# Altium PCB FPC.PcbDoc
Units mil, origin at the board's own origin, x right, y up, seen from the top; angles counter-clockwise.
Board outline 846.46 x 1196.85 mil, 4 copper layers (Top Layer, Layer 1, Layer 2, Bottom Layer), stack 23.756 mil thick; 10 components, 10 nets, 30 pads, 42 vias.
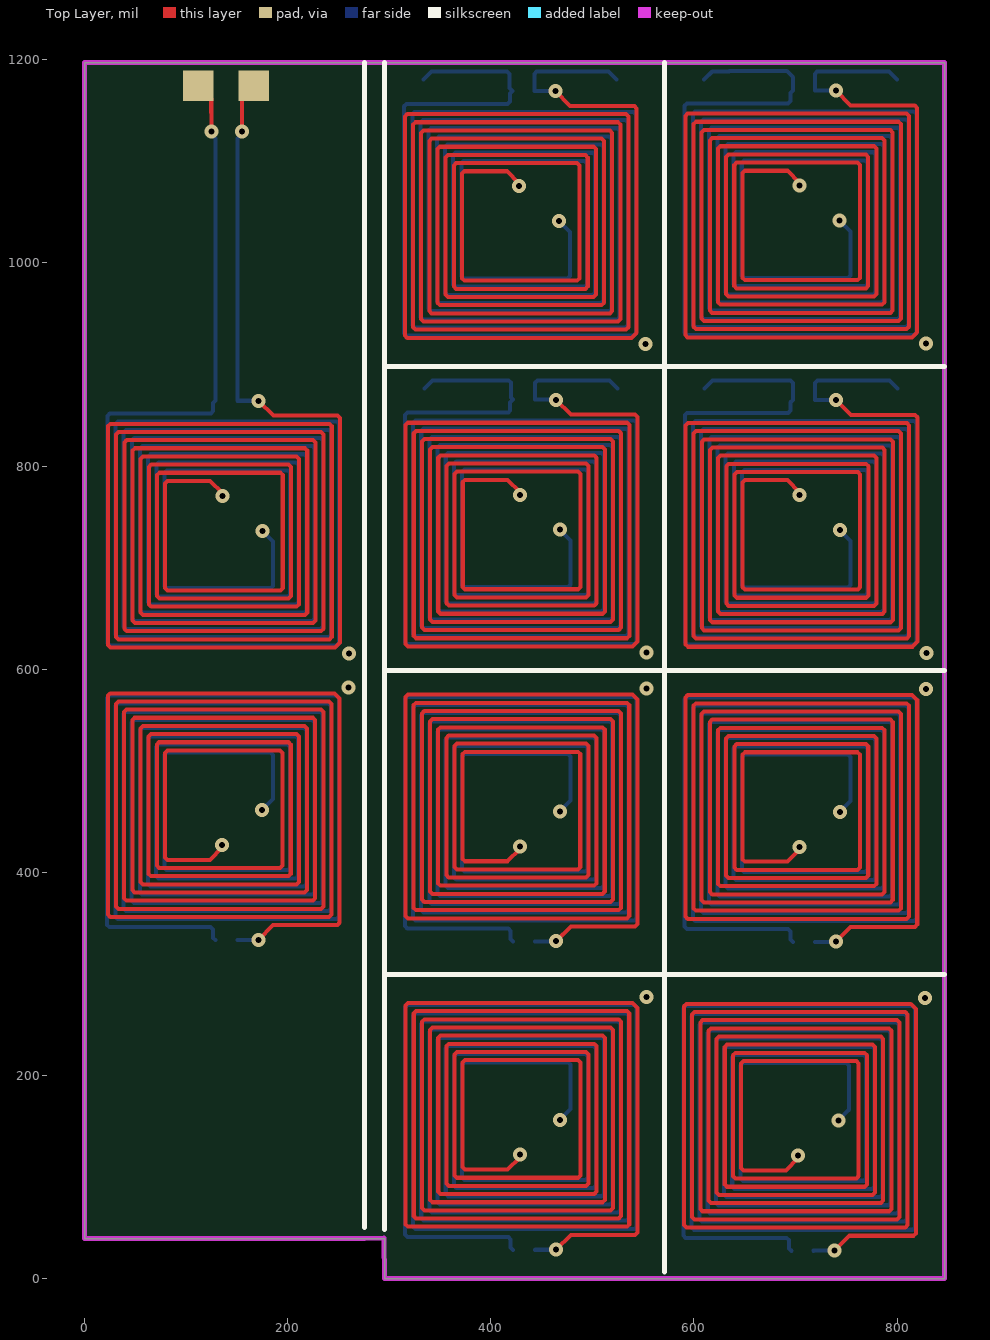
[diagram p0: Top Layer view]
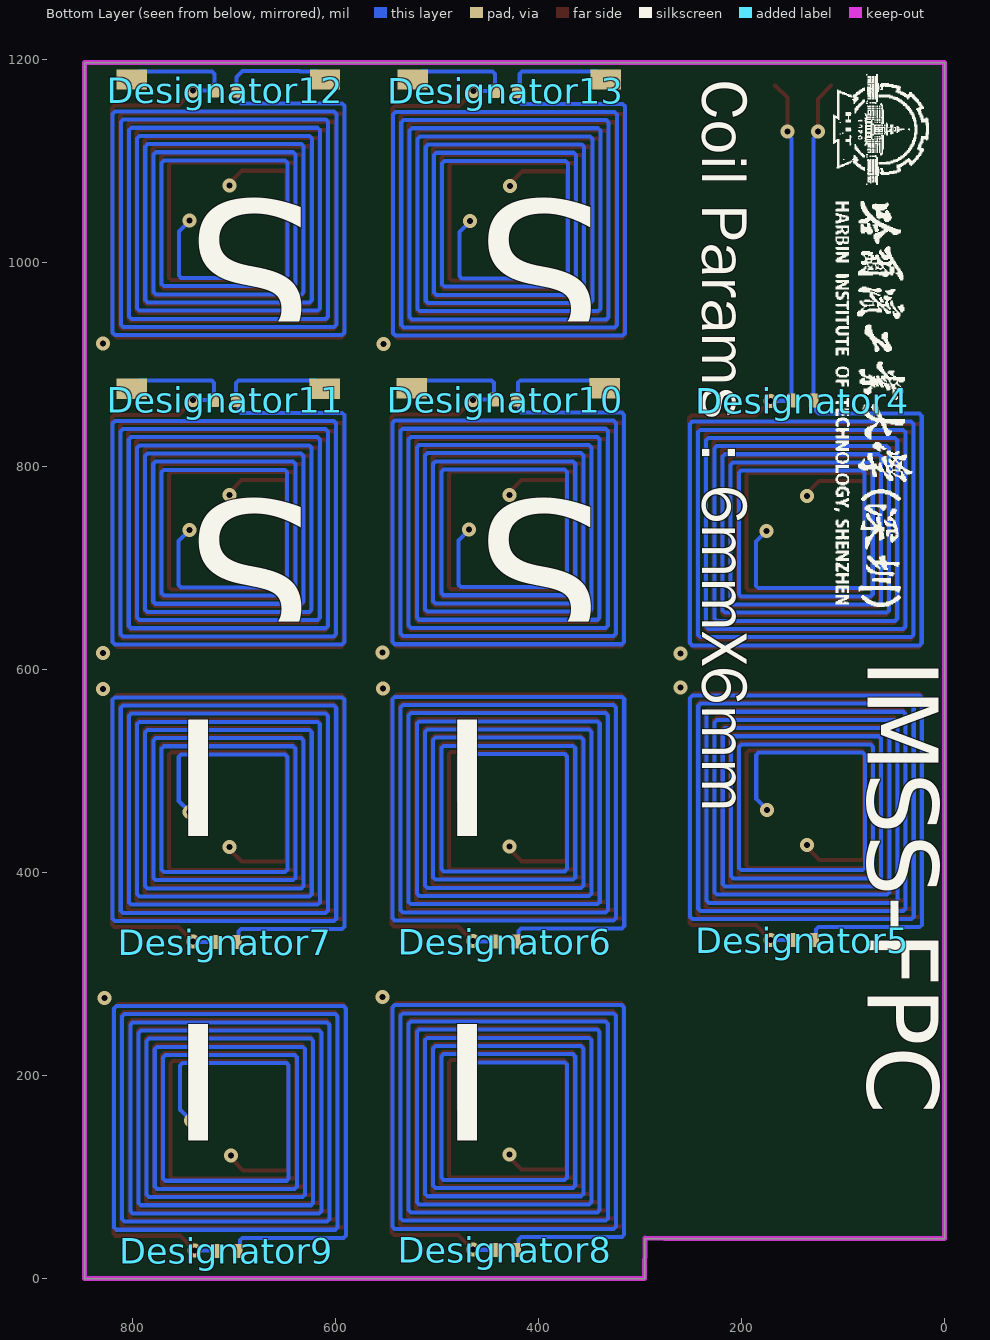
[diagram p1: Bottom Layer view, seen from below]
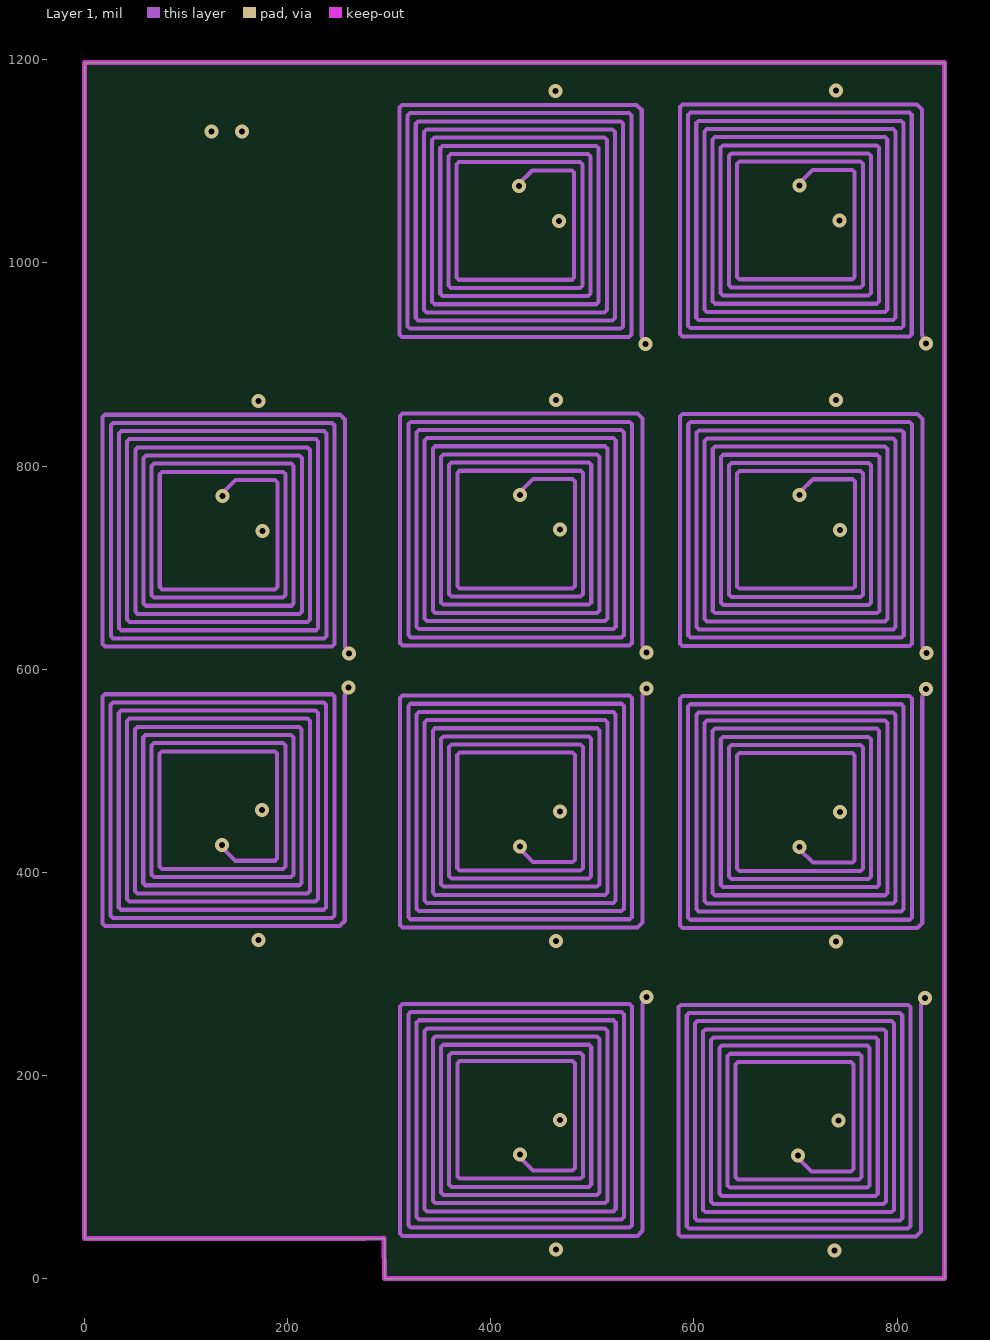
[diagram p2: Layer 1]
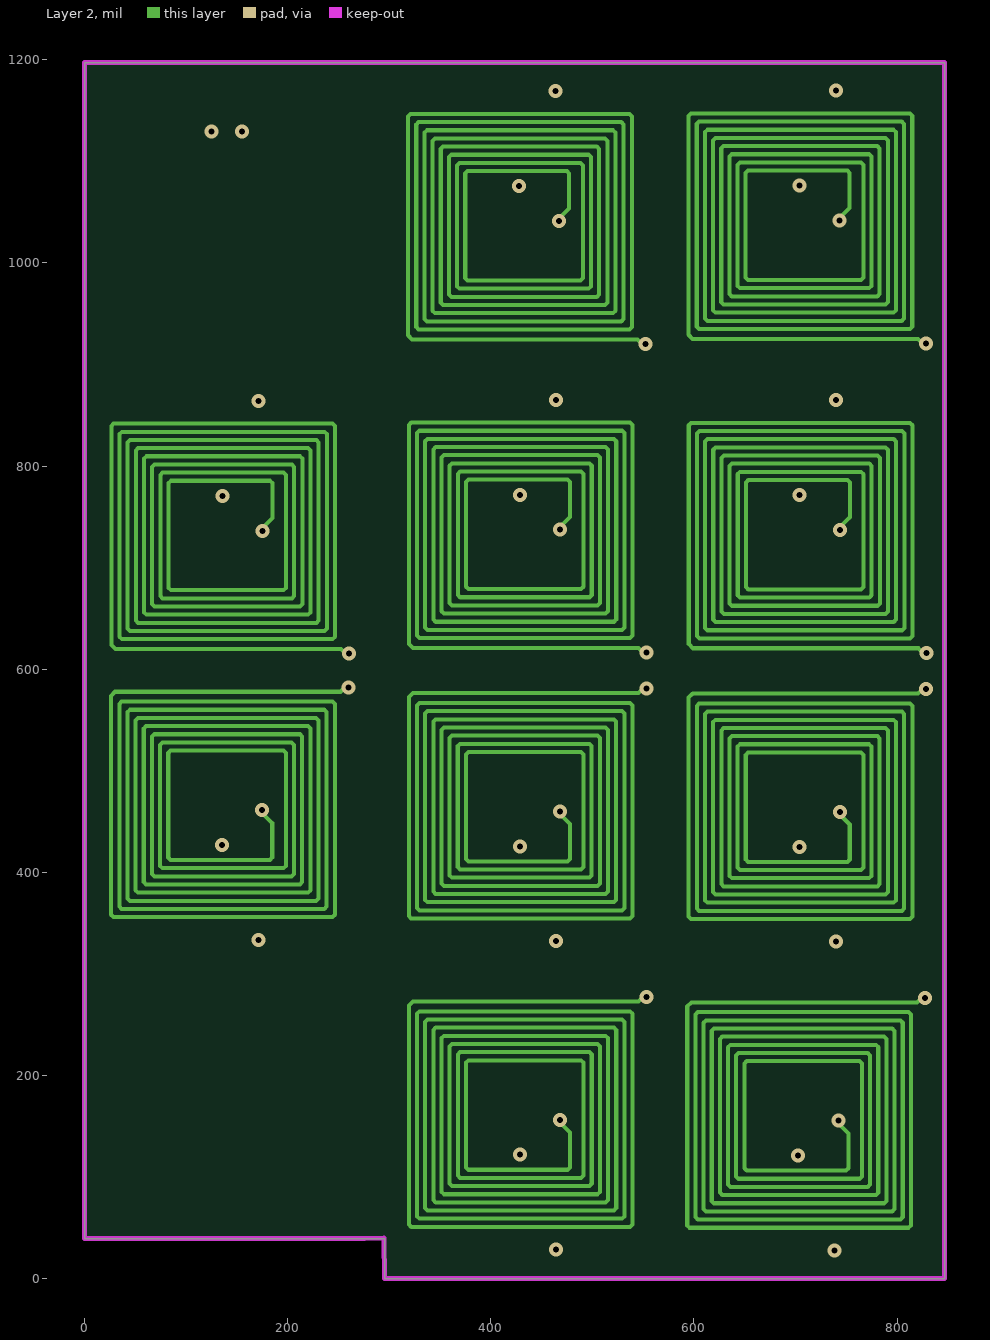
[diagram p3: Layer 2]
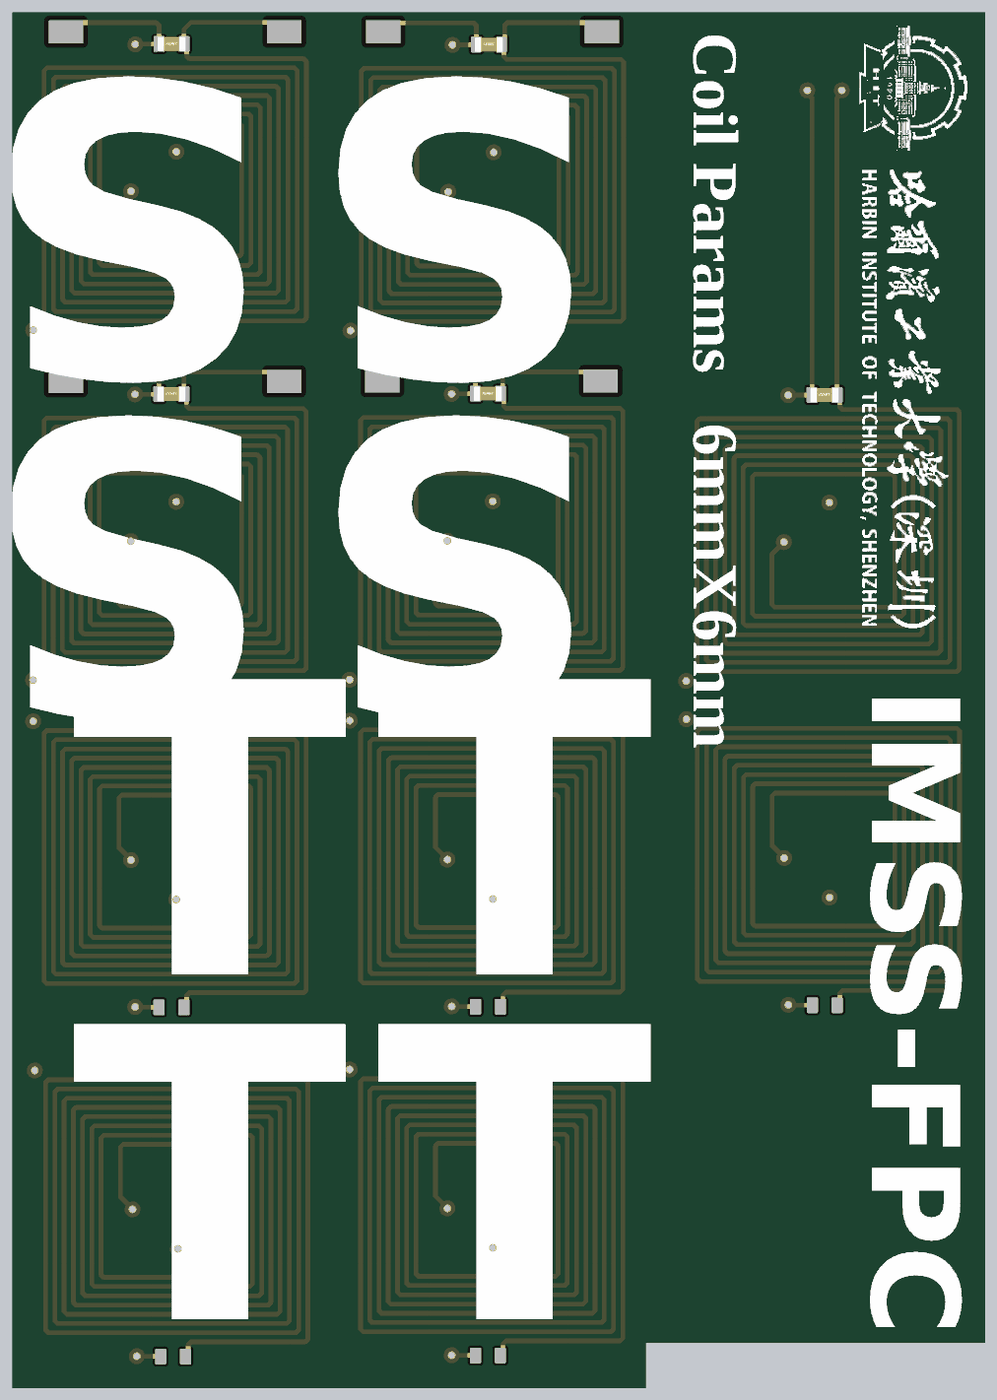
[diagram p4: 3D render of the assembled board from below, using the file's embedded part models]

## Layer stack, top to bottom
Top Solder: solder mask 0.4, Solder Resist, Dk 3.5
Top Layer: signal copper 1.4
Dielectric 2: prepreg 2.8, PP-006, Dk 4.1
Layer 1: signal copper 1.378
Dielectric 1: dielectric 12.6, FR-4, Dk 4.8
Layer 2: signal copper 1.378
Dielectric 3: prepreg 2.8, PP-006, Dk 4.1
Bottom Layer: signal copper 1.4
Bottom Solder: solder mask 0.4, Solder Resist, Dk 3.5

## Board outline
0.25,39.62 0.25,1197.1 846.71,1197.1 846.71,0.25 295.53,0.25 295.53,39.62

## Design rules (kind name [scope] priority, off if disabled: settings)
Clearance [All] p1: gap=4 ignorepadtopadclearanceinfootprint=FALSE
PolygonConnect [All] p1: connectstyle=Relief reliefconductorwidth=10 reliefentries=4 polygonreliefangle="90 Angle" airgapwidth=10
RoutingVias [All] p1: holewidth=11.81 width=19.68 viastyle="Through Hole" minholewidth=13.78 minwidth=5.91 maxholewidth=11.81 maxwidth=19.68
SolderMaskExpansion [All] p1: expansion=4 istentingtop=FALSE
Width [All] p1: maxlimit=10 minlimit=4 preferedwidth=10
30 further rules are at their usual default settings.

## Components (designator, comment, footprint, x,y, rotation, side; value= is the part's Value field where it differs from the comment)
Designator4 "Comment" CAP_0201 140,864.37 r180 bottom
Designator5 "Comment" CAP_0201 139.8,333.31 r180 bottom
Designator6 "Comment" CAP_0201 432.81,331.97 r180 bottom
Designator7 "Comment" CAP_0201 708.23,331.49 r180 bottom
Designator8 "Comment" CAP_0201 432.85,28.46 r180 bottom
Designator9 "Comment" CAP_0201 706.84,27.62 r180 bottom
Designator10 "Comment" CAP_0201 432.86,865.43 r180 bottom
Designator11 "Comment" CAP_0201 708.34,865.11 r180 bottom
Designator12 "Comment" CAP_0201 708.17,1169.67 r180 bottom
Designator13 "Comment" CAP_0201 432.11,1169.18 r180 bottom

## Footprints (in the part's own frame and the unit in brackets; to place one, negate y for a bottom-side part, rotate by r counter-clockwise, add the part's x,y. Pads: shape width x height; smd on the part's side, far side on the other; paste and mask are expansions set on the pad)
CAP_0201 [mm]
  rrect25% 0.25x0.35 smd mask+0.05: 1(-0.275,0) 2(0.275,0)
  body extent -0.32,-0.17 0.31,0.16, height 0.34

## Free pads (board coordinates)
  rect 30x30 smd: A(111.92,1174.44) B(166.92,1174.44)
  rect 30x20 smd far side: A(333.86,1180.35) A(334.76,876.45) A(610.06,1180.35) A(610.23,876.13) B(523.86,1180.35) B(524.76,876.45) B(800.06,1180.35) B(800.23,876.13)

## Via types
v1: diameter 13.78, hole 5.91, Top Layer to Bottom Layer, tented both sides, 42 vias

## Nets (pads, with @x,y where several pads share a name; then routed paths per layer and width w, separated by ;. In a path a pad name is that pad's centre, name@x,y a point inside that pad or via, vN(x,y) a via of type N, cw(c..) or ccw(c..) an arc to the next point about the centre after c; other vN are vias at no path point)
1: Designator13.1 Designator13.2 pad.A@333.86,1180.35 pad.B@523.86,1180.35 | length 21802.4
  Top Layer w4: v1(427.93,1075.43) 427.93,1078.08 415.87,1090.14 374.05,1090.14 371.71,1087.8 371.71,984.77 374.05,982.42 485.11,982.42 487.46,984.77 487.46,1095.83 485.11,1098.17 366.02,1098.17 363.68,1095.83 363.68,976.73 366.02,974.39 493.14,974.39 495.49,976.73 495.49,1103.86 493.14,1106.2 357.99,1106.2 355.64,1103.86 355.64,968.7 357.99,966.36 501.18,966.36 503.52,968.7 503.52,1111.89 501.18,1114.23 349.96,1114.23 347.61,1111.89 347.61,960.67 349.96,958.33 509.21,958.33 511.55,960.67 511.55,1119.92 509.21,1122.27 341.92,1122.27 339.58,1119.92 339.58,952.64 341.92,950.3 517.24,950.3 519.58,952.64 519.58,1127.95 517.24,1130.3 333.89,1130.3 331.55,1127.95 331.55,944.61 333.89,942.27 525.27,942.27 527.61,944.61 527.61,1135.99 525.27,1138.33 325.86,1138.33 323.52,1135.99 323.52,936.58 325.86,934.23 533.3,934.23 535.64,936.58 535.64,1144.02 533.3,1146.36 317.83,1146.36 315.49,1144.02 315.49,928.55 317.83,926.2 538.72,926.2 543.68,931.16 543.68,1152.05 541.33,1154.39 478.21,1154.39 v1(463.71,1168.89)
  Layer 1 w4: v1(427.93,1075.43) 427.93,1078.08 440.9,1091.05 479.8,1091.05 482.14,1088.7 482.14,985.67 479.8,983.33 368.74,983.33 366.4,985.67 366.4,1096.73 368.74,1099.08 487.83,1099.08 490.18,1096.73 490.18,977.64 487.83,975.3 360.71,975.3 358.36,977.64 358.36,1104.76 360.71,1107.11 495.86,1107.11 498.21,1104.76 498.21,969.61 495.86,967.27 352.68,967.27 350.33,969.61 350.33,1112.8 352.68,1115.14 503.9,1115.14 506.24,1112.8 506.24,961.58 503.9,959.23 344.64,959.23 342.3,961.58 342.3,1120.83 344.64,1123.17 511.93,1123.17 514.27,1120.83 514.27,953.55 511.93,951.2 336.61,951.2 334.27,953.55 334.27,1128.86 336.61,1131.2 519.96,1131.2 522.3,1128.86 522.3,945.51 519.96,943.17 328.58,943.17 326.24,945.51 326.24,1136.89 328.58,1139.23 527.99,1139.23 530.33,1136.89 530.33,937.48 527.99,935.14 320.55,935.14 318.21,937.48 318.21,1144.92 320.55,1147.27 536.02,1147.27 538.36,1144.92 538.36,929.45 536.02,927.11 312.52,927.11 310.18,929.45 310.18,1152.95 312.52,1155.3 543.71,1155.3 548.66,1150.35 548.66,928.49 548.83,928.32 548.83,926.57 552.48,922.92 v1(552.48,920.27)
  Layer 2 w4: v1(467.43,1041.09) 467.43,1043.83 477.27,1053.66 477.27,1087.95 474.93,1090.3 377.27,1090.3 374.93,1087.95 374.93,984.92 377.27,982.58 488.33,982.58 490.68,984.92 490.68,1095.99 488.33,1098.33 369.24,1098.33 366.9,1095.99 366.9,976.89 369.24,974.55 496.36,974.55 498.71,976.89 498.71,1104.02 496.36,1106.36 361.21,1106.36 358.86,1104.02 358.86,968.86 361.21,966.52 504.39,966.52 506.74,968.86 506.74,1112.05 504.39,1114.39 353.18,1114.39 350.83,1112.05 350.83,960.83 353.18,958.49 512.43,958.49 514.77,960.83 514.77,1120.08 512.43,1122.42 345.14,1122.42 342.8,1120.08 342.8,952.8 345.14,950.45 520.46,950.45 522.8,952.8 522.8,1128.11 520.46,1130.45 337.11,1130.45 334.77,1128.11 334.77,944.77 337.11,942.42 528.49,942.42 530.83,944.77 530.83,1136.14 528.49,1138.49 329.08,1138.49 326.74,1136.14 326.74,936.73 329.08,934.39 536.52,934.39 538.86,936.73 538.86,1144.17 536.52,1146.52 321.05,1146.52 318.71,1144.17 318.71,928.7 322.73,924.68 544.64,924.68 547.17,922.15 550.61,922.15 v1(552.48,920.27)
  Bottom Layer w4: pad.A@333.86,1180.35 341.82,1188.31 416.02,1188.31 418.36,1185.97 418.36,1172.1 Designator13.2 418.94,1166.84 418.94,1158.77 416.6,1156.43 317.17,1156.43 314.83,1154.08 314.83,930.67 317.17,928.33 540.68,928.33 543.02,930.67 543.02,1146.14 540.68,1148.49 325.2,1148.49 322.86,1146.14 322.86,938.7 325.2,936.36 532.64,936.36 534.99,938.7 534.99,1138.11 532.64,1140.45 333.24,1140.45 330.89,1138.11 330.89,946.73 333.24,944.39 524.61,944.39 526.96,946.73 526.96,1130.08 524.61,1132.42 341.27,1132.42 338.92,1130.08 338.92,954.77 341.27,952.42 516.58,952.42 518.92,954.77 518.92,1122.05 516.58,1124.39 349.3,1124.39 346.96,1122.05 346.96,962.8 349.3,960.45 508.55,960.45 510.89,962.8 510.89,1114.02 508.55,1116.36 357.33,1116.36 354.99,1114.02 354.99,970.83 357.33,968.49 500.52,968.49 502.86,970.83 502.86,1105.99 500.52,1108.33 365.36,1108.33 363.02,1105.99 363.02,978.86 365.36,976.52 492.49,976.52 494.83,978.86 494.83,1097.95 492.49,1100.3 373.39,1100.3 371.05,1097.95 371.05,986.89 373.39,984.55 475.53,984.55 477.88,986.89 477.88,1030.37 467.43,1040.81 v1(467.43,1041.09) ; v1(463.71,1168.89) 463.56,1169.04 443.08,1169.04 Designator13.1 442.94,1185.77 445.28,1188.11 516.1,1188.11 pad.B@523.86,1180.35
2: Designator12.1 Designator12.2 pad.A@610.06,1180.35 pad.B@800.06,1180.35 | length 21801.5
  Top Layer w4: v1(703.98,1075.92) 703.98,1078.57 691.92,1090.63 650.11,1090.63 647.76,1088.29 647.76,985.26 650.11,982.91 761.17,982.91 763.51,985.26 763.51,1096.32 761.17,1098.66 642.07,1098.66 639.73,1096.32 639.73,977.23 642.07,974.88 769.2,974.88 771.54,977.23 771.54,1104.35 769.2,1106.69 634.04,1106.69 631.7,1104.35 631.7,969.19 634.04,966.85 777.23,966.85 779.57,969.19 779.57,1112.38 777.23,1114.72 626.01,1114.72 623.67,1112.38 623.67,961.16 626.01,958.82 785.26,958.82 787.61,961.16 787.61,1120.41 785.26,1122.76 617.98,1122.76 615.64,1120.41 615.64,953.13 617.98,950.79 793.29,950.79 795.64,953.13 795.64,1128.44 793.29,1130.79 609.95,1130.79 607.61,1128.44 607.61,945.1 609.95,942.76 801.33,942.76 803.67,945.1 803.67,1136.48 801.33,1138.82 601.92,1138.82 599.57,1136.48 599.57,937.07 601.92,934.72 809.36,934.72 811.7,937.07 811.7,1144.51 809.36,1146.85 593.89,1146.85 591.54,1144.51 591.54,929.04 593.89,926.69 814.78,926.69 819.73,931.65 819.73,1152.54 817.39,1154.88 754.26,1154.88 v1(739.76,1169.38)
  Layer 1 w4: v1(703.98,1075.92) 703.98,1078.57 716.95,1091.54 755.86,1091.54 758.2,1089.19 758.2,986.16 755.86,983.82 644.79,983.82 642.45,986.16 642.45,1097.22 644.79,1099.57 763.89,1099.57 766.23,1097.22 766.23,978.13 763.89,975.79 636.76,975.79 634.42,978.13 634.42,1105.26 636.76,1107.6 771.92,1107.6 774.26,1105.26 774.26,970.1 771.92,967.76 628.73,967.76 626.39,970.1 626.39,1113.29 628.73,1115.63 779.95,1115.63 782.29,1113.29 782.29,962.07 779.95,959.72 620.7,959.72 618.36,962.07 618.36,1121.32 620.7,1123.66 787.98,1123.66 790.33,1121.32 790.33,954.04 787.98,951.69 612.67,951.69 610.33,954.04 610.33,1129.35 612.67,1131.69 796.01,1131.69 798.36,1129.35 798.36,946 796.01,943.66 604.64,943.66 602.29,946 602.29,1137.38 604.64,1139.72 804.05,1139.72 806.39,1137.38 806.39,937.97 804.05,935.63 596.61,935.63 594.26,937.97 594.26,1145.41 596.61,1147.76 812.08,1147.76 814.42,1145.41 814.42,929.94 812.08,927.6 588.57,927.6 586.23,929.94 586.23,1153.44 588.57,1155.79 819.76,1155.79 824.71,1150.84 824.71,928.98 824.89,928.81 824.89,927.06 828.54,923.41 v1(828.54,920.77)
  Layer 2 w4: v1(743.49,1041.58) 743.49,1044.32 753.32,1054.15 753.32,1088.44 750.98,1090.79 653.33,1090.79 650.98,1088.44 650.98,985.41 653.33,983.07 764.39,983.07 766.73,985.41 766.73,1096.48 764.39,1098.82 645.29,1098.82 642.95,1096.48 642.95,977.38 645.29,975.04 772.42,975.04 774.76,977.38 774.76,1104.51 772.42,1106.85 637.26,1106.85 634.92,1104.51 634.92,969.35 637.26,967.01 780.45,967.01 782.79,969.35 782.79,1112.54 780.45,1114.88 629.23,1114.88 626.89,1112.54 626.89,961.32 629.23,958.98 788.48,958.98 790.83,961.32 790.83,1120.57 788.48,1122.91 621.2,1122.91 618.86,1120.57 618.86,953.29 621.2,950.95 796.51,950.95 798.86,953.29 798.86,1128.6 796.51,1130.95 613.17,1130.95 610.83,1128.6 610.83,945.26 613.17,942.91 804.54,942.91 806.89,945.26 806.89,1136.63 804.54,1138.98 605.14,1138.98 602.79,1136.63 602.79,937.23 605.14,934.88 812.58,934.88 814.92,937.23 814.92,1144.66 812.58,1147.01 597.11,1147.01 594.76,1144.66 594.76,929.19 598.79,925.17 820.7,925.17 823.23,922.64 826.67,922.64 v1(828.54,920.77)
  Bottom Layer w4: pad.A@610.06,1180.35 618.06,1188.35 634.75,1188.35 635,1188.6 691.39,1188.6 697.34,1182.66 Designator12.2 695,1167.33 695,1159.26 692.65,1156.92 593.23,1156.92 590.88,1154.57 590.88,931.16 593.23,928.82 816.73,928.82 819.07,931.16 819.07,1146.63 816.73,1148.98 601.26,1148.98 598.92,1146.63 598.92,939.19 601.26,936.85 808.7,936.85 811.04,939.19 811.04,1138.6 808.7,1140.95 609.29,1140.95 606.95,1138.6 606.95,947.23 609.29,944.88 800.67,944.88 803.01,947.23 803.01,1130.57 800.67,1132.91 617.32,1132.91 614.98,1130.57 614.98,955.26 617.32,952.91 792.64,952.91 794.98,955.26 794.98,1122.54 792.64,1124.88 625.35,1124.88 623.01,1122.54 623.01,963.29 625.35,960.95 784.6,960.95 786.95,963.29 786.95,1114.51 784.6,1116.85 633.39,1116.85 631.04,1114.51 631.04,971.32 633.39,968.98 776.57,968.98 778.92,971.32 778.92,1106.48 776.57,1108.82 641.42,1108.82 639.07,1106.48 639.07,979.35 641.42,977.01 768.54,977.01 770.88,979.35 770.88,1098.44 768.54,1100.79 649.45,1100.79 647.11,1098.44 647.11,987.38 649.45,985.04 751.59,985.04 753.93,987.38 753.93,1030.86 743.49,1041.3 v1(743.49,1041.58) ; v1(739.76,1169.38) 739.62,1169.53 719.14,1169.53 Designator12.1 718.99,1185.87 721.34,1188.21 792.19,1188.21 pad.B@800.06,1180.35
3: Designator10.1 Designator10.2 pad.A@334.76,876.45 pad.B@524.76,876.45 | length 21802.6
  Top Layer w4: v1(428.68,771.68) 428.68,774.33 416.62,786.39 374.8,786.39 372.46,784.05 372.46,681.02 374.8,678.68 485.87,678.68 488.21,681.02 488.21,792.08 485.87,794.42 366.77,794.42 364.43,792.08 364.43,672.99 366.77,670.64 493.9,670.64 496.24,672.99 496.24,800.11 493.9,802.46 358.74,802.46 356.4,800.11 356.4,664.96 358.74,662.61 501.93,662.61 504.27,664.96 504.27,808.14 501.93,810.49 350.71,810.49 348.37,808.14 348.37,656.92 350.71,654.58 509.96,654.58 512.3,656.92 512.3,816.18 509.96,818.52 342.68,818.52 340.34,816.18 340.34,648.89 342.68,646.55 517.99,646.55 520.34,648.89 520.34,824.21 517.99,826.55 334.65,826.55 332.3,824.21 332.3,640.86 334.65,638.52 526.02,638.52 528.37,640.86 528.37,832.24 526.02,834.58 326.62,834.58 324.27,832.24 324.27,632.83 326.62,630.49 534.05,630.49 536.4,632.83 536.4,840.27 534.05,842.61 318.58,842.61 316.24,840.27 316.24,624.8 318.58,622.46 539.48,622.46 544.43,627.41 544.43,848.3 542.09,850.64 478.96,850.64 v1(464.46,865.14)
  Layer 1 w4: v1(428.68,771.68) 428.68,774.33 441.65,787.3 480.55,787.3 482.9,784.95 482.9,681.92 480.55,679.58 369.49,679.58 367.15,681.92 367.15,792.99 369.49,795.33 488.59,795.33 490.93,792.99 490.93,673.89 488.59,671.55 361.46,671.55 359.12,673.89 359.12,801.02 361.46,803.36 496.62,803.36 498.96,801.02 498.96,665.86 496.62,663.52 353.43,663.52 351.09,665.86 351.09,809.05 353.43,811.39 504.65,811.39 506.99,809.05 506.99,657.83 504.65,655.49 345.4,655.49 343.05,657.83 343.05,817.08 345.4,819.42 512.68,819.42 515.02,817.08 515.02,649.8 512.68,647.46 337.37,647.46 335.02,649.8 335.02,825.11 337.37,827.46 520.71,827.46 523.05,825.11 523.05,641.77 520.71,639.42 329.33,639.42 326.99,641.77 326.99,833.14 329.33,835.49 528.74,835.49 531.09,833.14 531.09,633.74 528.74,631.39 321.3,631.39 318.96,633.74 318.96,841.18 321.3,843.52 536.77,843.52 539.12,841.18 539.12,625.7 536.77,623.36 313.27,623.36 310.93,625.7 310.93,849.21 313.27,851.55 544.46,851.55 549.41,846.6 549.41,624.75 549.59,624.57 549.59,622.82 553.24,619.17 v1(553.24,616.53)
  Layer 2 w4: v1(468.19,737.35) 468.19,740.08 478.02,749.91 478.02,784.21 475.68,786.55 378.02,786.55 375.68,784.21 375.68,681.18 378.02,678.83 489.09,678.83 491.43,681.18 491.43,792.24 489.09,794.58 369.99,794.58 367.65,792.24 367.65,673.14 369.99,670.8 497.12,670.8 499.46,673.14 499.46,800.27 497.12,802.61 361.96,802.61 359.62,800.27 359.62,665.11 361.96,662.77 505.15,662.77 507.49,665.11 507.49,808.3 505.15,810.64 353.93,810.64 351.59,808.3 351.59,657.08 353.93,654.74 513.18,654.74 515.52,657.08 515.52,816.33 513.18,818.68 345.9,818.68 343.55,816.33 343.55,649.05 345.9,646.71 521.21,646.71 523.55,649.05 523.55,824.36 521.21,826.71 337.87,826.71 335.52,824.36 335.52,641.02 337.87,638.68 529.24,638.68 531.59,641.02 531.59,832.4 529.24,834.74 329.83,834.74 327.49,832.4 327.49,632.99 329.83,630.64 537.27,630.64 539.62,632.99 539.62,840.43 537.27,842.77 321.8,842.77 319.46,840.43 319.46,624.96 323.49,620.93 545.4,620.93 547.93,618.4 551.37,618.4 v1(553.24,616.53)
  Bottom Layer w4: pad.A@334.76,876.45 342.67,884.37 417.66,884.37 420,882.02 420,867.47 Designator10.2 419.12,862.51 419.12,854.45 417.35,852.68 317.93,852.68 315.58,850.34 315.58,626.92 317.93,624.58 541.43,624.58 543.77,626.92 543.77,842.4 541.43,844.74 325.96,844.74 323.61,842.4 323.61,634.96 325.96,632.61 533.4,632.61 535.74,634.96 535.74,834.36 533.4,836.71 333.99,836.71 331.65,834.36 331.65,642.99 333.99,640.64 525.37,640.64 527.71,642.99 527.71,826.33 525.37,828.68 342.02,828.68 339.68,826.33 339.68,651.02 342.02,648.68 517.33,648.68 519.68,651.02 519.68,818.3 517.33,820.64 350.05,820.64 347.71,818.3 347.71,659.05 350.05,656.71 509.3,656.71 511.65,659.05 511.65,810.27 509.3,812.61 358.08,812.61 355.74,810.27 355.74,667.08 358.08,664.74 501.27,664.74 503.61,667.08 503.61,802.24 501.27,804.58 366.11,804.58 363.77,802.24 363.77,675.11 366.11,672.77 493.24,672.77 495.58,675.11 495.58,794.21 493.24,796.55 374.15,796.55 371.8,794.21 371.8,683.14 374.15,680.8 476.29,680.8 478.63,683.14 478.63,726.62 468.19,737.07 v1(468.19,737.35) ; v1(464.46,865.14) 464.32,865.29 443.84,865.29 Designator10.1 443.69,881.96 446.03,884.3 516.91,884.3 pad.B@524.76,876.45
4: Designator11.1 Designator11.2 pad.A@610.23,876.13 pad.B@800.23,876.13 | length 21804
  Top Layer w4: v1(704.16,771.36) 704.16,774 692.1,786.07 650.28,786.07 647.94,783.72 647.94,680.69 650.28,678.35 761.34,678.35 763.69,680.69 763.69,791.76 761.34,794.1 642.25,794.1 639.91,791.76 639.91,672.66 642.25,670.32 769.37,670.32 771.72,672.66 771.72,799.79 769.37,802.13 634.22,802.13 631.88,799.79 631.88,664.63 634.22,662.29 777.41,662.29 779.75,664.63 779.75,807.82 777.41,810.16 626.19,810.16 623.84,807.82 623.84,656.6 626.19,654.26 785.44,654.26 787.78,656.6 787.78,815.85 785.44,818.19 618.16,818.19 615.81,815.85 615.81,648.57 618.16,646.23 793.47,646.23 795.81,648.57 795.81,823.88 793.47,826.23 610.12,826.23 607.78,823.88 607.78,640.54 610.12,638.19 801.5,638.19 803.84,640.54 803.84,831.91 801.5,834.26 602.09,834.26 599.75,831.91 599.75,632.51 602.09,630.16 809.53,630.16 811.88,632.51 811.88,839.94 809.53,842.29 594.06,842.29 591.72,839.94 591.72,624.47 594.06,622.13 814.95,622.13 819.91,627.08 819.91,847.98 817.56,850.32 754.44,850.32 v1(739.94,864.82)
  Layer 1 w4: v1(704.16,771.36) 704.16,774 717.13,786.97 756.03,786.97 758.37,784.63 758.37,681.6 756.03,679.26 644.97,679.26 642.63,681.6 642.63,792.66 644.97,795 764.06,795 766.41,792.66 766.41,673.57 764.06,671.23 636.94,671.23 634.6,673.57 634.6,800.69 636.94,803.04 772.09,803.04 774.44,800.69 774.44,665.54 772.09,663.19 628.91,663.19 626.56,665.54 626.56,808.72 628.91,811.07 780.13,811.07 782.47,808.72 782.47,657.51 780.13,655.16 620.88,655.16 618.53,657.51 618.53,816.76 620.88,819.1 788.16,819.1 790.5,816.76 790.5,649.47 788.16,647.13 612.84,647.13 610.5,649.47 610.5,824.79 612.84,827.13 796.19,827.13 798.53,824.79 798.53,641.44 796.19,639.1 604.81,639.1 602.47,641.44 602.47,832.82 604.81,835.16 804.22,835.16 806.56,832.82 806.56,633.41 804.22,631.07 596.78,631.07 594.44,633.41 594.44,840.85 596.78,843.19 812.25,843.19 814.6,840.85 814.6,625.38 812.25,623.04 588.75,623.04 586.41,625.38 586.41,848.88 588.75,851.23 819.94,851.23 824.89,846.27 824.89,624.42 825.06,624.24 825.06,622.5 828.71,618.85 v1(828.71,616.2)
  Layer 2 w4: v1(743.66,737.02) 743.66,739.75 753.5,749.59 753.5,783.88 751.16,786.23 653.5,786.23 651.16,783.88 651.16,680.85 653.5,678.51 764.56,678.51 766.91,680.85 766.91,791.91 764.56,794.26 645.47,794.26 643.13,791.91 643.13,672.82 645.47,670.48 772.59,670.48 774.94,672.82 774.94,799.94 772.59,802.29 637.44,802.29 635.09,799.94 635.09,664.79 637.44,662.45 780.63,662.45 782.97,664.79 782.97,807.98 780.63,810.32 629.41,810.32 627.06,807.98 627.06,656.76 629.41,654.41 788.66,654.41 791,656.76 791,816.01 788.66,818.35 621.37,818.35 619.03,816.01 619.03,648.73 621.37,646.38 796.69,646.38 799.03,648.73 799.03,824.04 796.69,826.38 613.34,826.38 611,824.04 611,640.69 613.34,638.35 804.72,638.35 807.06,640.69 807.06,832.07 804.72,834.41 605.31,834.41 602.97,832.07 602.97,632.66 605.31,630.32 812.75,630.32 815.09,632.66 815.09,840.1 812.75,842.45 597.28,842.45 594.94,840.1 594.94,624.63 598.96,620.6 820.87,620.6 823.4,618.07 826.84,618.07 v1(828.71,616.2)
  Bottom Layer w4: pad.A@610.23,876.13 618.2,884.09 695.17,884.09 697.51,881.75 Designator11.2 695.17,862.77 695.17,854.7 692.83,852.36 593.4,852.36 591.06,850.01 591.06,626.6 593.4,624.26 816.91,624.26 819.25,626.6 819.25,842.07 816.91,844.41 601.43,844.41 599.09,842.07 599.09,634.63 601.43,632.29 808.87,632.29 811.22,634.63 811.22,834.04 808.87,836.38 609.47,836.38 607.12,834.04 607.12,642.66 609.47,640.32 800.84,640.32 803.19,642.66 803.19,826.01 800.84,828.35 617.5,828.35 615.15,826.01 615.15,650.69 617.5,648.35 792.81,648.35 795.15,650.69 795.15,817.98 792.81,820.32 625.53,820.32 623.19,817.98 623.19,658.73 625.53,656.38 784.78,656.38 787.12,658.73 787.12,809.94 784.78,812.29 633.56,812.29 631.22,809.94 631.22,666.76 633.56,664.41 776.75,664.41 779.09,666.76 779.09,801.91 776.75,804.26 641.59,804.26 639.25,801.91 639.25,674.79 641.59,672.45 768.72,672.45 771.06,674.79 771.06,793.88 768.72,796.23 649.62,796.23 647.28,793.88 647.28,682.82 649.62,680.48 751.76,680.48 754.11,682.82 754.11,726.3 743.66,736.74 v1(743.66,737.02) ; v1(739.94,864.82) 739.79,864.96 719.31,864.96 Designator11.1 719.17,881.68 721.51,884.03 792.34,884.03 pad.B@800.23,876.13
5: Designator6.1 Designator6.2 | length 21593.9
  Top Layer w4: v1(428.63,425.72) 428.63,423.07 416.56,411.01 374.75,411.01 372.41,413.35 372.41,516.38 374.75,518.73 485.81,518.73 488.15,516.38 488.15,405.32 485.81,402.98 366.72,402.98 364.37,405.32 364.37,524.41 366.72,526.76 493.84,526.76 496.19,524.41 496.19,397.29 493.84,394.95 358.69,394.95 356.34,397.29 356.34,532.45 358.69,534.79 501.87,534.79 504.22,532.45 504.22,389.26 501.87,386.91 350.65,386.91 348.31,389.26 348.31,540.48 350.65,542.82 509.91,542.82 512.25,540.48 512.25,381.23 509.91,378.88 342.62,378.88 340.28,381.23 340.28,548.51 342.62,550.85 517.94,550.85 520.28,548.51 520.28,373.19 517.94,370.85 334.59,370.85 332.25,373.19 332.25,556.54 334.59,558.88 525.97,558.88 528.31,556.54 528.31,365.16 525.97,362.82 326.56,362.82 324.22,365.16 324.22,564.57 326.56,566.91 534,566.91 536.34,564.57 536.34,357.13 534,354.79 318.53,354.79 316.19,357.13 316.19,572.6 318.53,574.95 539.42,574.95 544.37,569.99 544.37,349.1 542.03,346.76 478.91,346.76 v1(464.41,332.26)
  Layer 1 w4: v1(428.63,425.72) 428.63,423.07 441.6,410.1 480.5,410.1 482.84,412.45 482.84,515.48 480.5,517.82 369.44,517.82 367.09,515.48 367.09,404.42 369.44,402.07 488.53,402.07 490.87,404.42 490.87,523.51 488.53,525.85 361.41,525.85 359.06,523.51 359.06,396.38 361.41,394.04 496.56,394.04 498.91,396.38 498.91,531.54 496.56,533.88 353.37,533.88 351.03,531.54 351.03,388.35 353.37,386.01 504.59,386.01 506.94,388.35 506.94,539.57 504.59,541.91 345.34,541.91 343,539.57 343,380.32 345.34,377.98 512.63,377.98 514.97,380.32 514.97,547.6 512.63,549.95 337.31,549.95 334.97,547.6 334.97,372.29 337.31,369.95 520.66,369.95 523,372.29 523,555.63 520.66,557.98 329.28,557.98 326.94,555.63 326.94,364.26 329.28,361.91 528.69,361.91 531.03,364.26 531.03,563.67 528.69,566.01 321.25,566.01 318.91,563.67 318.91,356.23 321.25,353.88 536.72,353.88 539.06,356.23 539.06,571.7 536.72,574.04 313.22,574.04 310.87,571.7 310.87,348.19 313.22,345.85 544.41,345.85 549.36,350.8 549.36,572.65 549.53,572.83 549.53,574.58 553.18,578.23 v1(553.18,580.87)
  Layer 2 w4: v1(468.13,460.06) 468.13,457.32 477.97,447.49 477.97,413.19 475.62,410.85 377.97,410.85 375.63,413.19 375.63,516.23 377.97,518.57 489.03,518.57 491.37,516.23 491.37,405.16 489.03,402.82 369.94,402.82 367.59,405.16 367.59,524.26 369.94,526.6 497.06,526.6 499.4,524.26 499.4,397.13 497.06,394.79 361.91,394.79 359.56,397.13 359.56,532.29 361.91,534.63 505.09,534.63 507.44,532.29 507.44,389.1 505.09,386.76 353.87,386.76 351.53,389.1 351.53,540.32 353.87,542.66 513.12,542.66 515.47,540.32 515.47,381.07 513.12,378.73 345.84,378.73 343.5,381.07 343.5,548.35 345.84,550.69 521.16,550.69 523.5,548.35 523.5,373.04 521.16,370.69 337.81,370.69 335.47,373.04 335.47,556.38 337.81,558.73 529.19,558.73 531.53,556.38 531.53,365.01 529.19,362.66 329.78,362.66 327.44,365.01 327.44,564.41 329.78,566.76 537.22,566.76 539.56,564.41 539.56,356.97 537.22,354.63 321.75,354.63 319.4,356.97 319.4,572.45 323.43,576.47 545.34,576.47 547.87,579 551.31,579 v1(553.18,580.87)
  Bottom Layer w4: Designator6.2 419.64,334.31 419.64,342.38 417.3,344.72 317.87,344.72 315.53,347.06 315.53,570.48 317.87,572.82 541.37,572.82 543.72,570.48 543.72,355.01 541.37,352.66 325.9,352.66 323.56,355.01 323.56,562.45 325.9,564.79 533.34,564.79 535.69,562.45 535.69,363.04 533.34,360.69 333.93,360.69 331.59,363.04 331.59,554.41 333.93,556.76 525.31,556.76 527.65,554.41 527.65,371.07 525.31,368.73 341.97,368.73 339.62,371.07 339.62,546.38 341.97,548.73 517.28,548.73 519.62,546.38 519.62,379.1 517.28,376.76 350,376.76 347.65,379.1 347.65,538.35 350,540.69 509.25,540.69 511.59,538.35 511.59,387.13 509.25,384.79 358.03,384.79 355.69,387.13 355.69,530.32 358.03,532.66 501.22,532.66 503.56,530.32 503.56,395.16 501.22,392.82 366.06,392.82 363.72,395.16 363.72,522.29 366.06,524.63 493.18,524.63 495.53,522.29 495.53,403.19 493.18,400.85 374.09,400.85 371.75,403.19 371.75,514.26 374.09,516.6 476.23,516.6 478.58,514.26 478.58,470.78 468.13,460.33 v1(468.13,460.06) ; Designator6.1 443.78,332.11 464.26,332.11 v1(464.41,332.26)
6: Designator7.1 Designator7.2 | length 21593.9
  Top Layer w4: v1(704.05,425.24) 704.05,422.6 691.99,410.54 650.17,410.54 647.83,412.88 647.83,515.91 650.17,518.25 761.23,518.25 763.58,515.91 763.58,404.85 761.23,402.5 642.14,402.5 639.8,404.85 639.8,523.94 642.14,526.28 769.26,526.28 771.61,523.94 771.61,396.82 769.26,394.47 634.11,394.47 631.76,396.82 631.76,531.97 634.11,534.31 777.29,534.31 779.64,531.97 779.64,388.78 777.29,386.44 626.08,386.44 623.73,388.78 623.73,540 626.08,542.35 785.33,542.35 787.67,540 787.67,380.75 785.33,378.41 618.04,378.41 615.7,380.75 615.7,548.03 618.04,550.38 793.36,550.38 795.7,548.03 795.7,372.72 793.36,370.38 610.01,370.38 607.67,372.72 607.67,556.07 610.01,558.41 801.39,558.41 803.73,556.07 803.73,364.69 801.39,362.35 601.98,362.35 599.64,364.69 599.64,564.1 601.98,566.44 809.42,566.44 811.76,564.1 811.76,356.66 809.42,354.31 593.95,354.31 591.61,356.66 591.61,572.13 593.95,574.47 814.84,574.47 819.8,569.52 819.8,348.63 817.45,346.28 754.33,346.28 v1(739.83,331.78)
  Layer 1 w4: v1(704.05,425.24) 704.05,422.6 717.02,409.63 755.92,409.63 758.26,411.97 758.26,515 755.92,517.35 644.86,517.35 642.52,515 642.52,403.94 644.86,401.6 763.95,401.6 766.29,403.94 766.29,523.03 763.95,525.38 636.83,525.38 634.48,523.03 634.48,395.91 636.83,393.57 771.98,393.57 774.33,395.91 774.33,531.07 771.98,533.41 628.8,533.41 626.45,531.07 626.45,387.88 628.8,385.54 780.01,385.54 782.36,387.88 782.36,539.1 780.01,541.44 620.76,541.44 618.42,539.1 618.42,379.85 620.76,377.5 788.05,377.5 790.39,379.85 790.39,547.13 788.05,549.47 612.73,549.47 610.39,547.13 610.39,371.82 612.73,369.47 796.08,369.47 798.42,371.82 798.42,555.16 796.08,557.5 604.7,557.5 602.36,555.16 602.36,363.78 604.7,361.44 804.11,361.44 806.45,363.78 806.45,563.19 804.11,565.54 596.67,565.54 594.33,563.19 594.33,355.75 596.67,353.41 812.14,353.41 814.48,355.75 814.48,571.22 812.14,573.57 588.64,573.57 586.29,571.22 586.29,347.72 588.64,345.38 819.83,345.38 824.78,350.33 824.78,572.18 824.95,572.36 824.95,574.1 828.6,577.75 v1(828.6,580.4)
  Layer 2 w4: v1(743.55,459.58) 743.55,456.85 753.39,447.01 753.39,412.72 751.05,410.38 653.39,410.38 651.05,412.72 651.05,515.75 653.39,518.09 764.45,518.09 766.79,515.75 766.79,404.69 764.45,402.35 645.36,402.35 643.02,404.69 643.02,523.78 645.36,526.13 772.48,526.13 774.83,523.78 774.83,396.66 772.48,394.31 637.33,394.31 634.98,396.66 634.98,531.81 637.33,534.16 780.51,534.16 782.86,531.81 782.86,388.63 780.51,386.28 629.3,386.28 626.95,388.63 626.95,539.85 629.3,542.19 788.55,542.19 790.89,539.85 790.89,380.6 788.55,378.25 621.26,378.25 618.92,380.6 618.92,547.88 621.26,550.22 796.58,550.22 798.92,547.88 798.92,372.56 796.58,370.22 613.23,370.22 610.89,372.56 610.89,555.91 613.23,558.25 804.61,558.25 806.95,555.91 806.95,364.53 804.61,362.19 605.2,362.19 602.86,364.53 602.86,563.94 605.2,566.28 812.64,566.28 814.98,563.94 814.98,356.5 812.64,354.16 597.17,354.16 594.83,356.5 594.83,571.97 598.85,576 820.76,576 823.29,578.53 826.73,578.53 v1(828.6,580.4)
  Bottom Layer w4: Designator7.2 695.06,333.84 695.06,341.9 692.72,344.25 593.29,344.25 590.95,346.59 590.95,570 593.29,572.35 816.79,572.35 819.14,570 819.14,354.53 816.79,352.19 601.32,352.19 598.98,354.53 598.98,561.97 601.32,564.31 808.76,564.31 811.11,561.97 811.11,362.56 808.76,360.22 609.36,360.22 607.01,362.56 607.01,553.94 609.36,556.28 800.73,556.28 803.07,553.94 803.07,370.6 800.73,368.25 617.39,368.25 615.04,370.6 615.04,545.91 617.39,548.25 792.7,548.25 795.04,545.91 795.04,378.63 792.7,376.28 625.42,376.28 623.07,378.63 623.07,537.88 625.42,540.22 784.67,540.22 787.01,537.88 787.01,386.66 784.67,384.31 633.45,384.31 631.11,386.66 631.11,529.85 633.45,532.19 776.64,532.19 778.98,529.85 778.98,394.69 776.64,392.35 641.48,392.35 639.14,394.69 639.14,521.81 641.48,524.16 768.61,524.16 770.95,521.81 770.95,402.72 768.61,400.38 649.51,400.38 647.17,402.72 647.17,513.78 649.51,516.13 751.65,516.13 754,513.78 754,470.3 743.55,459.86 v1(743.55,459.58) ; Designator7.1 719.2,331.64 739.68,331.64 v1(739.83,331.78)
7: Designator8.1 Designator8.2 | length 21593.9
  Top Layer w4: v1(428.67,122.22) 428.67,119.57 416.61,107.51 374.79,107.51 372.45,109.85 372.45,212.88 374.79,215.22 485.86,215.22 488.2,212.88 488.2,101.82 485.86,99.48 366.76,99.48 364.42,101.82 364.42,220.91 366.76,223.25 493.89,223.25 496.23,220.91 496.23,93.79 493.89,91.44 358.73,91.44 356.39,93.79 356.39,228.94 358.73,231.29 501.92,231.29 504.26,228.94 504.26,85.76 501.92,83.41 350.7,83.41 348.36,85.76 348.36,236.97 350.7,239.32 509.95,239.32 512.29,236.97 512.29,77.72 509.95,75.38 342.67,75.38 340.32,77.72 340.32,245.01 342.67,247.35 517.98,247.35 520.32,245.01 520.32,69.69 517.98,67.35 334.64,67.35 332.29,69.69 332.29,253.04 334.64,255.38 526.01,255.38 528.36,253.04 528.36,61.66 526.01,59.32 326.6,59.32 324.26,61.66 324.26,261.07 326.6,263.41 534.04,263.41 536.39,261.07 536.39,53.63 534.04,51.29 318.57,51.29 316.23,53.63 316.23,269.1 318.57,271.44 539.47,271.44 544.42,266.49 544.42,45.6 542.08,43.25 478.95,43.25 v1(464.45,28.76)
  Layer 1 w4: v1(428.67,122.22) 428.67,119.57 441.64,106.6 480.54,106.6 482.89,108.94 482.89,211.97 480.54,214.32 369.48,214.32 367.14,211.97 367.14,100.91 369.48,98.57 488.57,98.57 490.92,100.91 490.92,220.01 488.57,222.35 361.45,222.35 359.11,220.01 359.11,92.88 361.45,90.54 496.61,90.54 498.95,92.88 498.95,228.04 496.61,230.38 353.42,230.38 351.08,228.04 351.08,84.85 353.42,82.51 504.64,82.51 506.98,84.85 506.98,236.07 504.64,238.41 345.39,238.41 343.04,236.07 343.04,76.82 345.39,74.48 512.67,74.48 515.01,76.82 515.01,244.1 512.67,246.44 337.36,246.44 335.01,244.1 335.01,68.79 337.36,66.44 520.7,66.44 523.04,68.79 523.04,252.13 520.7,254.48 329.32,254.48 326.98,252.13 326.98,60.76 329.32,58.41 528.73,58.41 531.08,60.76 531.08,260.16 528.73,262.51 321.29,262.51 318.95,260.16 318.95,52.72 321.29,50.38 536.76,50.38 539.11,52.72 539.11,268.2 536.76,270.54 313.26,270.54 310.92,268.2 310.92,44.69 313.26,42.35 544.45,42.35 549.4,47.3 549.4,269.15 549.58,269.33 549.58,271.08 553.23,274.73 v1(553.23,277.37)
  Layer 2 w4: v1(468.18,156.55) 468.18,153.82 478.01,143.98 478.01,109.69 475.67,107.35 378.01,107.35 375.67,109.69 375.67,212.72 378.01,215.07 489.07,215.07 491.42,212.72 491.42,101.66 489.07,99.32 369.98,99.32 367.64,101.66 367.64,220.75 369.98,223.1 497.11,223.1 499.45,220.75 499.45,93.63 497.11,91.29 361.95,91.29 359.61,93.63 359.61,228.79 361.95,231.13 505.14,231.13 507.48,228.79 507.48,85.6 505.14,83.25 353.92,83.25 351.58,85.6 351.58,236.82 353.92,239.16 513.17,239.16 515.51,236.82 515.51,77.57 513.17,75.22 345.89,75.22 343.54,77.57 343.54,244.85 345.89,247.19 521.2,247.19 523.54,244.85 523.54,69.54 521.2,67.19 337.86,67.19 335.51,69.54 335.51,252.88 337.86,255.22 529.23,255.22 531.58,252.88 531.58,61.5 529.23,59.16 329.82,59.16 327.48,61.5 327.48,260.91 329.82,263.25 537.26,263.25 539.61,260.91 539.61,53.47 537.26,51.13 321.79,51.13 319.45,53.47 319.45,268.94 323.48,272.97 545.39,272.97 547.92,275.5 551.36,275.5 v1(553.23,277.37)
  Bottom Layer w4: Designator8.2 419.68,30.81 419.68,38.88 417.34,41.22 317.92,41.22 315.57,43.56 315.57,266.97 317.92,269.32 541.42,269.32 543.76,266.97 543.76,51.5 541.42,49.16 325.95,49.16 323.6,51.5 323.6,258.94 325.95,261.29 533.39,261.29 535.73,258.94 535.73,59.54 533.39,57.19 333.98,57.19 331.63,59.54 331.63,250.91 333.98,253.25 525.35,253.25 527.7,250.91 527.7,67.57 525.35,65.22 342.01,65.22 339.67,67.57 339.67,242.88 342.01,245.22 517.32,245.22 519.67,242.88 519.67,75.6 517.32,73.25 350.04,73.25 347.7,75.6 347.7,234.85 350.04,237.19 509.29,237.19 511.63,234.85 511.63,83.63 509.29,81.29 358.07,81.29 355.73,83.63 355.73,226.82 358.07,229.16 501.26,229.16 503.6,226.82 503.6,91.66 501.26,89.32 366.1,89.32 363.76,91.66 363.76,218.79 366.1,221.13 493.23,221.13 495.57,218.79 495.57,99.69 493.23,97.35 374.14,97.35 371.79,99.69 371.79,210.75 374.14,213.1 476.28,213.1 478.62,210.75 478.62,167.28 468.18,156.83 v1(468.18,156.55) ; Designator8.1 443.82,28.61 464.31,28.61 v1(464.45,28.76)
8: Designator9.1 Designator9.2 | length 21593.9
  Top Layer w4: v1(702.66,121.37) 702.66,118.73 690.6,106.66 648.78,106.66 646.44,109.01 646.44,212.04 648.78,214.38 759.84,214.38 762.19,212.04 762.19,100.98 759.84,98.63 640.75,98.63 638.41,100.98 638.41,220.07 640.75,222.41 767.88,222.41 770.22,220.07 770.22,92.94 767.88,90.6 632.72,90.6 630.38,92.94 630.38,228.1 632.72,230.44 775.91,230.44 778.25,228.1 778.25,84.91 775.91,82.57 624.69,82.57 622.35,84.91 622.35,236.13 624.69,238.47 783.94,238.47 786.28,236.13 786.28,76.88 783.94,74.54 616.66,74.54 614.31,76.88 614.31,244.16 616.66,246.51 791.97,246.51 794.31,244.16 794.31,68.85 791.97,66.51 608.63,66.51 606.28,68.85 606.28,252.19 608.63,254.54 800,254.54 802.35,252.19 802.35,60.82 800,58.48 600.59,58.48 598.25,60.82 598.25,260.23 600.59,262.57 808.03,262.57 810.38,260.23 810.38,52.79 808.03,50.44 592.56,50.44 590.22,52.79 590.22,268.26 592.56,270.6 813.46,270.6 818.41,265.65 818.41,44.76 816.07,42.41 752.94,42.41 v1(738.44,27.91)
  Layer 1 w4: v1(702.66,121.37) 702.66,118.73 715.63,105.76 754.53,105.76 756.88,108.1 756.88,211.13 754.53,213.47 643.47,213.47 641.13,211.13 641.13,100.07 643.47,97.73 762.56,97.73 764.91,100.07 764.91,219.16 762.56,221.51 635.44,221.51 633.1,219.16 633.1,92.04 635.44,89.7 770.6,89.7 772.94,92.04 772.94,227.19 770.6,229.54 627.41,229.54 625.07,227.19 625.07,84.01 627.41,81.66 778.63,81.66 780.97,84.01 780.97,235.23 778.63,237.57 619.38,237.57 617.03,235.23 617.03,75.98 619.38,73.63 786.66,73.63 789,75.98 789,243.26 786.66,245.6 611.35,245.6 609,243.26 609,67.94 611.35,65.6 794.69,65.6 797.03,67.94 797.03,251.29 794.69,253.63 603.31,253.63 600.97,251.29 600.97,59.91 603.31,57.57 802.72,57.57 805.07,59.91 805.07,259.32 802.72,261.66 595.28,261.66 592.94,259.32 592.94,51.88 595.28,49.54 810.75,49.54 813.1,51.88 813.1,267.35 810.75,269.7 587.25,269.7 584.91,267.35 584.91,43.85 587.25,41.51 818.44,41.51 823.39,46.46 823.39,268.31 823.57,268.49 823.57,270.23 827.22,273.88 v1(827.22,276.53)
  Layer 2 w4: v1(742.17,155.71) 742.17,152.98 752,143.14 752,108.85 749.66,106.51 652,106.51 649.66,108.85 649.66,211.88 652,214.22 763.06,214.22 765.41,211.88 765.41,100.82 763.06,98.47 643.97,98.47 641.63,100.82 641.63,219.91 643.97,222.25 771.1,222.25 773.44,219.91 773.44,92.79 771.1,90.44 635.94,90.44 633.6,92.79 633.6,227.94 635.94,230.29 779.13,230.29 781.47,227.94 781.47,84.76 779.13,82.41 627.91,82.41 625.56,84.76 625.56,235.97 627.91,238.32 787.16,238.32 789.5,235.97 789.5,76.72 787.16,74.38 619.88,74.38 617.53,76.72 617.53,244.01 619.88,246.35 795.19,246.35 797.53,244.01 797.53,68.69 795.19,66.35 611.85,66.35 609.5,68.69 609.5,252.04 611.85,254.38 803.22,254.38 805.56,252.04 805.56,60.66 803.22,58.32 603.81,58.32 601.47,60.66 601.47,260.07 603.81,262.41 811.25,262.41 813.6,260.07 813.6,52.63 811.25,50.29 595.78,50.29 593.44,52.63 593.44,268.1 597.47,272.13 819.38,272.13 821.91,274.66 825.34,274.66 v1(827.22,276.53)
  Bottom Layer w4: Designator9.2 693.67,29.96 693.67,38.03 691.33,40.38 591.9,40.38 589.56,42.72 589.56,266.13 591.9,268.48 815.41,268.48 817.75,266.13 817.75,50.66 815.41,48.32 599.94,48.32 597.59,50.66 597.59,258.1 599.94,260.44 807.38,260.44 809.72,258.1 809.72,58.69 807.38,56.35 607.97,56.35 605.62,58.69 605.62,250.07 607.97,252.41 799.34,252.41 801.69,250.07 801.69,66.72 799.34,64.38 616,64.38 613.66,66.72 613.66,242.04 616,244.38 791.31,244.38 793.66,242.04 793.66,74.76 791.31,72.41 624.03,72.41 621.69,74.76 621.69,234.01 624.03,236.35 783.28,236.35 785.62,234.01 785.62,82.79 783.28,80.44 632.06,80.44 629.72,82.79 629.72,225.97 632.06,228.32 775.25,228.32 777.59,225.97 777.59,90.82 775.25,88.47 640.09,88.47 637.75,90.82 637.75,217.94 640.09,220.29 767.22,220.29 769.56,217.94 769.56,98.85 767.22,96.51 648.13,96.51 645.78,98.85 645.78,209.91 648.13,212.25 750.27,212.25 752.61,209.91 752.61,166.43 742.17,155.99 v1(742.17,155.71) ; Designator9.1 717.81,27.77 738.3,27.77 v1(738.44,27.91)
NewNet: Designator4.1 Designator4.2 pad.A@111.92,1174.44 pad.B@166.92,1174.44 | length 22227.9
  Top Layer w4: pad.A@111.92,1174.44 124.92,1161.44 124.92,1147.71 125,1147.62 v1(125,1129.37) ; v1(135.82,770.62) 135.82,773.27 123.76,785.33 81.94,785.33 79.6,782.98 79.6,679.95 81.94,677.61 193,677.61 195.35,679.95 195.35,791.02 193,793.36 73.91,793.36 71.57,791.02 71.57,671.92 73.91,669.58 201.03,669.58 203.38,671.92 203.38,799.05 201.03,801.39 65.88,801.39 63.53,799.05 63.53,663.89 65.88,661.55 209.07,661.55 211.41,663.89 211.41,807.08 209.07,809.42 57.85,809.42 55.5,807.08 55.5,655.86 57.85,653.52 217.1,653.52 219.44,655.86 219.44,815.11 217.1,817.45 49.81,817.45 47.47,815.11 47.47,647.83 49.81,645.49 225.13,645.49 227.47,647.83 227.47,823.14 225.13,825.49 41.78,825.49 39.44,823.14 39.44,639.8 41.78,637.45 233.16,637.45 235.5,639.8 235.5,831.17 233.16,833.52 33.75,833.52 31.41,831.17 31.41,631.77 33.75,629.42 241.19,629.42 243.53,631.77 243.53,839.21 241.19,841.55 25.72,841.55 23.38,839.21 23.38,623.73 25.72,621.39 246.61,621.39 251.57,626.34 251.57,847.24 249.22,849.58 186.1,849.58 v1(171.6,864.08) ; v1(155,1129.37) 155,1162.52 pad.B@166.92,1174.44
  Layer 1 w4: v1(135.82,770.62) 135.82,773.27 148.79,786.23 187.69,786.23 190.03,783.89 190.03,680.86 187.69,678.52 76.63,678.52 74.29,680.86 74.29,791.92 76.63,794.26 195.72,794.26 198.07,791.92 198.07,672.83 195.72,670.49 68.6,670.49 66.25,672.83 66.25,799.95 68.6,802.3 203.75,802.3 206.1,799.95 206.1,664.8 203.75,662.45 60.57,662.45 58.22,664.8 58.22,807.98 60.57,810.33 211.79,810.33 214.13,807.98 214.13,656.77 211.79,654.42 52.53,654.42 50.19,656.77 50.19,816.02 52.53,818.36 219.82,818.36 222.16,816.02 222.16,648.73 219.82,646.39 44.5,646.39 42.16,648.73 42.16,824.05 44.5,826.39 227.85,826.39 230.19,824.05 230.19,640.7 227.85,638.36 36.47,638.36 34.13,640.7 34.13,832.08 36.47,834.42 235.88,834.42 238.22,832.08 238.22,632.67 235.88,630.33 28.44,630.33 26.1,632.67 26.1,840.11 28.44,842.45 243.91,842.45 246.25,840.11 246.25,624.64 243.91,622.3 20.41,622.3 18.07,624.64 18.07,848.14 20.41,850.49 251.6,850.49 256.55,845.54 256.55,623.68 256.72,623.5 256.72,621.76 260.37,618.11 v1(260.37,615.46)
  Layer 2 w4: v1(175.32,736.28) 175.32,739.02 185.16,748.85 185.16,783.14 182.82,785.49 85.16,785.49 82.82,783.14 82.82,680.11 85.16,677.77 196.22,677.77 198.57,680.11 198.57,791.17 196.22,793.52 77.13,793.52 74.79,791.17 74.79,672.08 77.13,669.74 204.25,669.74 206.6,672.08 206.6,799.21 204.25,801.55 69.1,801.55 66.75,799.21 66.75,664.05 69.1,661.71 212.28,661.71 214.63,664.05 214.63,807.24 212.28,809.58 61.07,809.58 58.72,807.24 58.72,656.02 61.07,653.67 220.32,653.67 222.66,656.02 222.66,815.27 220.32,817.61 53.03,817.61 50.69,815.27 50.69,647.99 53.03,645.64 228.35,645.64 230.69,647.99 230.69,823.3 228.35,825.64 45,825.64 42.66,823.3 42.66,639.95 45,637.61 236.38,637.61 238.72,639.95 238.72,831.33 236.38,833.67 36.97,833.67 34.63,831.33 34.63,631.92 36.97,629.58 244.41,629.58 246.75,631.92 246.75,839.36 244.41,841.71 28.94,841.71 26.6,839.36 26.6,623.89 30.62,619.86 252.53,619.86 255.06,617.33 258.5,617.33 v1(260.37,615.46)
  Bottom Layer w4: v1(125,1129.37) 125,1126.72 129.17,1122.55 Designator4.2 126.83,862.03 126.83,853.96 124.49,851.62 25.06,851.62 22.72,849.27 22.72,625.86 25.06,623.52 248.57,623.52 250.91,625.86 250.91,841.33 248.57,843.67 33.09,843.67 30.75,841.33 30.75,633.89 33.09,631.55 240.53,631.55 242.88,633.89 242.88,833.3 240.53,835.64 41.13,835.64 38.78,833.3 38.78,641.92 41.13,639.58 232.5,639.58 234.85,641.92 234.85,825.27 232.5,827.61 49.16,827.61 46.81,825.27 46.81,649.95 49.16,647.61 224.47,647.61 226.81,649.95 226.81,817.24 224.47,819.58 57.19,819.58 54.85,817.24 54.85,657.99 57.19,655.64 216.44,655.64 218.78,657.99 218.78,809.21 216.44,811.55 65.22,811.55 62.88,809.21 62.88,666.02 65.22,663.67 208.41,663.67 210.75,666.02 210.75,801.17 208.41,803.52 73.25,803.52 70.91,801.17 70.91,674.05 73.25,671.71 200.38,671.71 202.72,674.05 202.72,793.14 200.38,795.49 81.28,795.49 78.94,793.14 78.94,682.08 81.28,679.74 183.42,679.74 185.77,682.08 185.77,725.56 175.32,736 v1(175.32,736.28) ; v1(155,1129.37) 155,1126.72 150.83,1122.55 Designator4.1 150.97,864.22 171.45,864.22 v1(171.6,864.08)
NewNet2: Designator5.1 Designator5.2 | length 21593.9
  Top Layer w4: v1(135.62,427.07) 135.62,424.42 123.56,412.36 81.74,412.36 79.4,414.7 79.4,517.73 81.74,520.07 192.8,520.07 195.15,517.73 195.15,406.67 192.8,404.33 73.71,404.33 71.37,406.67 71.37,525.76 73.71,528.1 200.83,528.1 203.18,525.76 203.18,398.64 200.83,396.29 65.68,396.29 63.33,398.64 63.33,533.79 65.68,536.14 208.86,536.14 211.21,533.79 211.21,390.61 208.86,388.26 57.65,388.26 55.3,390.61 55.3,541.82 57.65,544.17 216.9,544.17 219.24,541.82 219.24,382.57 216.9,380.23 49.61,380.23 47.27,382.57 47.27,549.86 49.61,552.2 224.93,552.2 227.27,549.86 227.27,374.54 224.93,372.2 41.58,372.2 39.24,374.54 39.24,557.89 41.58,560.23 232.96,560.23 235.3,557.89 235.3,366.51 232.96,364.17 33.55,364.17 31.21,366.51 31.21,565.92 33.55,568.26 240.99,568.26 243.33,565.92 243.33,358.48 240.99,356.14 25.52,356.14 23.18,358.48 23.18,573.95 25.52,576.29 246.41,576.29 251.37,571.34 251.37,350.45 249.02,348.1 185.9,348.1 v1(171.4,333.61)
  Layer 1 w4: v1(135.62,427.07) 135.62,424.42 148.59,411.45 187.49,411.45 189.83,413.79 189.83,516.82 187.49,519.17 76.43,519.17 74.09,516.82 74.09,405.76 76.43,403.42 195.52,403.42 197.86,405.76 197.86,524.86 195.52,527.2 68.4,527.2 66.05,524.86 66.05,397.73 68.4,395.39 203.55,395.39 205.9,397.73 205.9,532.89 203.55,535.23 60.37,535.23 58.02,532.89 58.02,389.7 60.37,387.36 211.58,387.36 213.93,389.7 213.93,540.92 211.58,543.26 52.33,543.26 49.99,540.92 49.99,381.67 52.33,379.33 219.62,379.33 221.96,381.67 221.96,548.95 219.62,551.29 44.3,551.29 41.96,548.95 41.96,373.64 44.3,371.29 227.65,371.29 229.99,373.64 229.99,556.98 227.65,559.33 36.27,559.33 33.93,556.98 33.93,365.61 36.27,363.26 235.68,363.26 238.02,365.61 238.02,565.01 235.68,567.36 28.24,567.36 25.9,565.01 25.9,357.57 28.24,355.23 243.71,355.23 246.05,357.57 246.05,573.04 243.71,575.39 20.21,575.39 17.86,573.04 17.86,349.54 20.21,347.2 251.4,347.2 256.35,352.15 256.35,574 256.52,574.18 256.52,575.93 260.17,579.57 v1(260.17,582.22)
  Layer 2 w4: v1(175.12,461.4) 175.12,458.67 184.96,448.83 184.96,414.54 182.62,412.2 84.96,412.2 82.62,414.54 82.62,517.57 84.96,519.92 196.02,519.92 198.36,517.57 198.36,406.51 196.02,404.17 76.93,404.17 74.58,406.51 74.58,525.6 76.93,527.95 204.05,527.95 206.4,525.6 206.4,398.48 204.05,396.14 68.9,396.14 66.55,398.48 66.55,533.64 68.9,535.98 212.08,535.98 214.43,533.64 214.43,390.45 212.08,388.1 60.87,388.1 58.52,390.45 58.52,541.67 60.87,544.01 220.12,544.01 222.46,541.67 222.46,382.42 220.12,380.07 52.83,380.07 50.49,382.42 50.49,549.7 52.83,552.04 228.15,552.04 230.49,549.7 230.49,374.38 228.15,372.04 44.8,372.04 42.46,374.38 42.46,557.73 44.8,560.07 236.18,560.07 238.52,557.73 238.52,366.35 236.18,364.01 36.77,364.01 34.43,366.35 34.43,565.76 36.77,568.1 244.21,568.1 246.55,565.76 246.55,358.32 244.21,355.98 28.74,355.98 26.4,358.32 26.4,573.79 30.42,577.82 252.33,577.82 254.86,580.35 258.3,580.35 v1(260.17,582.22)
  Bottom Layer w4: Designator5.2 126.63,335.66 126.63,343.73 124.29,346.07 24.86,346.07 22.52,348.41 22.52,571.82 24.86,574.17 248.36,574.17 250.71,571.82 250.71,356.35 248.36,354.01 32.89,354.01 30.55,356.35 30.55,563.79 32.89,566.14 240.33,566.14 242.68,563.79 242.68,364.38 240.33,362.04 40.92,362.04 38.58,364.38 38.58,555.76 40.92,558.1 232.3,558.1 234.64,555.76 234.64,372.42 232.3,370.07 48.96,370.07 46.61,372.42 46.61,547.73 48.96,550.07 224.27,550.07 226.61,547.73 226.61,380.45 224.27,378.1 56.99,378.1 54.64,380.45 54.64,539.7 56.99,542.04 216.24,542.04 218.58,539.7 218.58,388.48 216.24,386.14 65.02,386.14 62.68,388.48 62.68,531.67 65.02,534.01 208.21,534.01 210.55,531.67 210.55,396.51 208.21,394.17 73.05,394.17 70.71,396.51 70.71,523.64 73.05,525.98 200.18,525.98 202.52,523.64 202.52,404.54 200.18,402.2 81.08,402.2 78.74,404.54 78.74,515.6 81.08,517.95 183.22,517.95 185.57,515.6 185.57,472.13 175.12,461.68 v1(175.12,461.4) ; Designator5.1 150.77,333.46 171.25,333.46 v1(171.4,333.61)

## Keep-outs
Keep-Out Layer:
  lines w5: 0.25,39.62 0.25,315.21 0.25,323.08 0.25,598.68 0.25,874.27 0.25,882.14 0.25,1157.73 0.25,1197.1 275.84,1197.1 295.53,1197.1 571.12,1197.1 846.71,1197.1 846.71,1157.73 846.71,882.14 846.71,874.27 846.71,598.68 846.71,323.08 846.71,315.21 846.71,0.25 571.12,0.25 295.53,0.25 295,40 275.84,39.62 0.25,39.62

## Silkscreen, mask and mechanical layers (free items; w line width, h text height)
Top Overlay:
  lines w5: 275.84,50.71 275.84,315.21 275.84,323.08 275.84,598.68 275.84,874.27 275.84,882.14 275.84,1157.73 275.84,1197.1 ; 295.53,48.64 295.53,315.21 295.53,323.08 295.53,598.68 ; 295.53,299.46 571.12,299.46 846.71,299.46 ; 295.53,897.89 571.12,897.89 846.71,897.89 ; 295.53,1197.1 295.53,1157.73 295.53,882.14 295.53,874.27 295.53,598.68 ; 571.12,6.76 571.12,315.21 571.12,323.08 571.12,598.68 ; 571.12,1197.1 571.12,1157.73 571.12,882.14 571.12,874.27 571.12,598.68 ; 846.71,598.68 571.12,598.68 ; 295.53,598.68 571.12,598.68
Bottom Overlay:
  drawing of 231 lines, arcs and shapes, not listed
  text "Coil Params：6mmX6mm" at 253.89,1180 h80 r90
  text "S" at 335,1136.67 h400 r180
  text "S" at 620,1136.67 h400 r180
  text "S" at 335,841.67 h400 r180
  text "S" at 620,841.67 h400 r180
  text "IMSS-FPC" at 99,610 h120 r90
  text "T" at 530,360 h400
  text "T" at 795,360 h400
  text "T" at 530,60 h400
  text "T" at 795,60 h400
Mechanical 1:
  lines w5: 10.09,49.46 10.09,285.68 266,285.68 266,49.46 10.09,49.46 ; 10.09,313.24 10.09,588.83 266,588.83 266,313.24 10.09,313.24 ; 10.09,608.52 266,608.52 266,884.11 10.09,884.11 10.09,608.52 ; 10.09,911.67 10.09,1147.89 266,1147.89 266,911.67 10.09,911.67
  text "LDC13xx16xx_CMD_DRIVE_CURRENT_CHx设置：0xE900" at 0,1480 h60
  text "1.客编放在底层" at 0,1365.32 h60
  text "2.补强说明： / 本层（Mechanical 1）4处矩形框选区域顶层PI补强，厚度0.225mm" at 0,1225 h60